# Altium PCB LED_Driver.PcbDoc
Units mm, origin at the board's own origin, x right, y up, seen from the top; angles counter-clockwise.
Board outline 83.27 x 96.75 mm, 2 copper layers (Top Layer, Bottom Layer); 19 components, 12 nets, 55 pads, 0 vias.
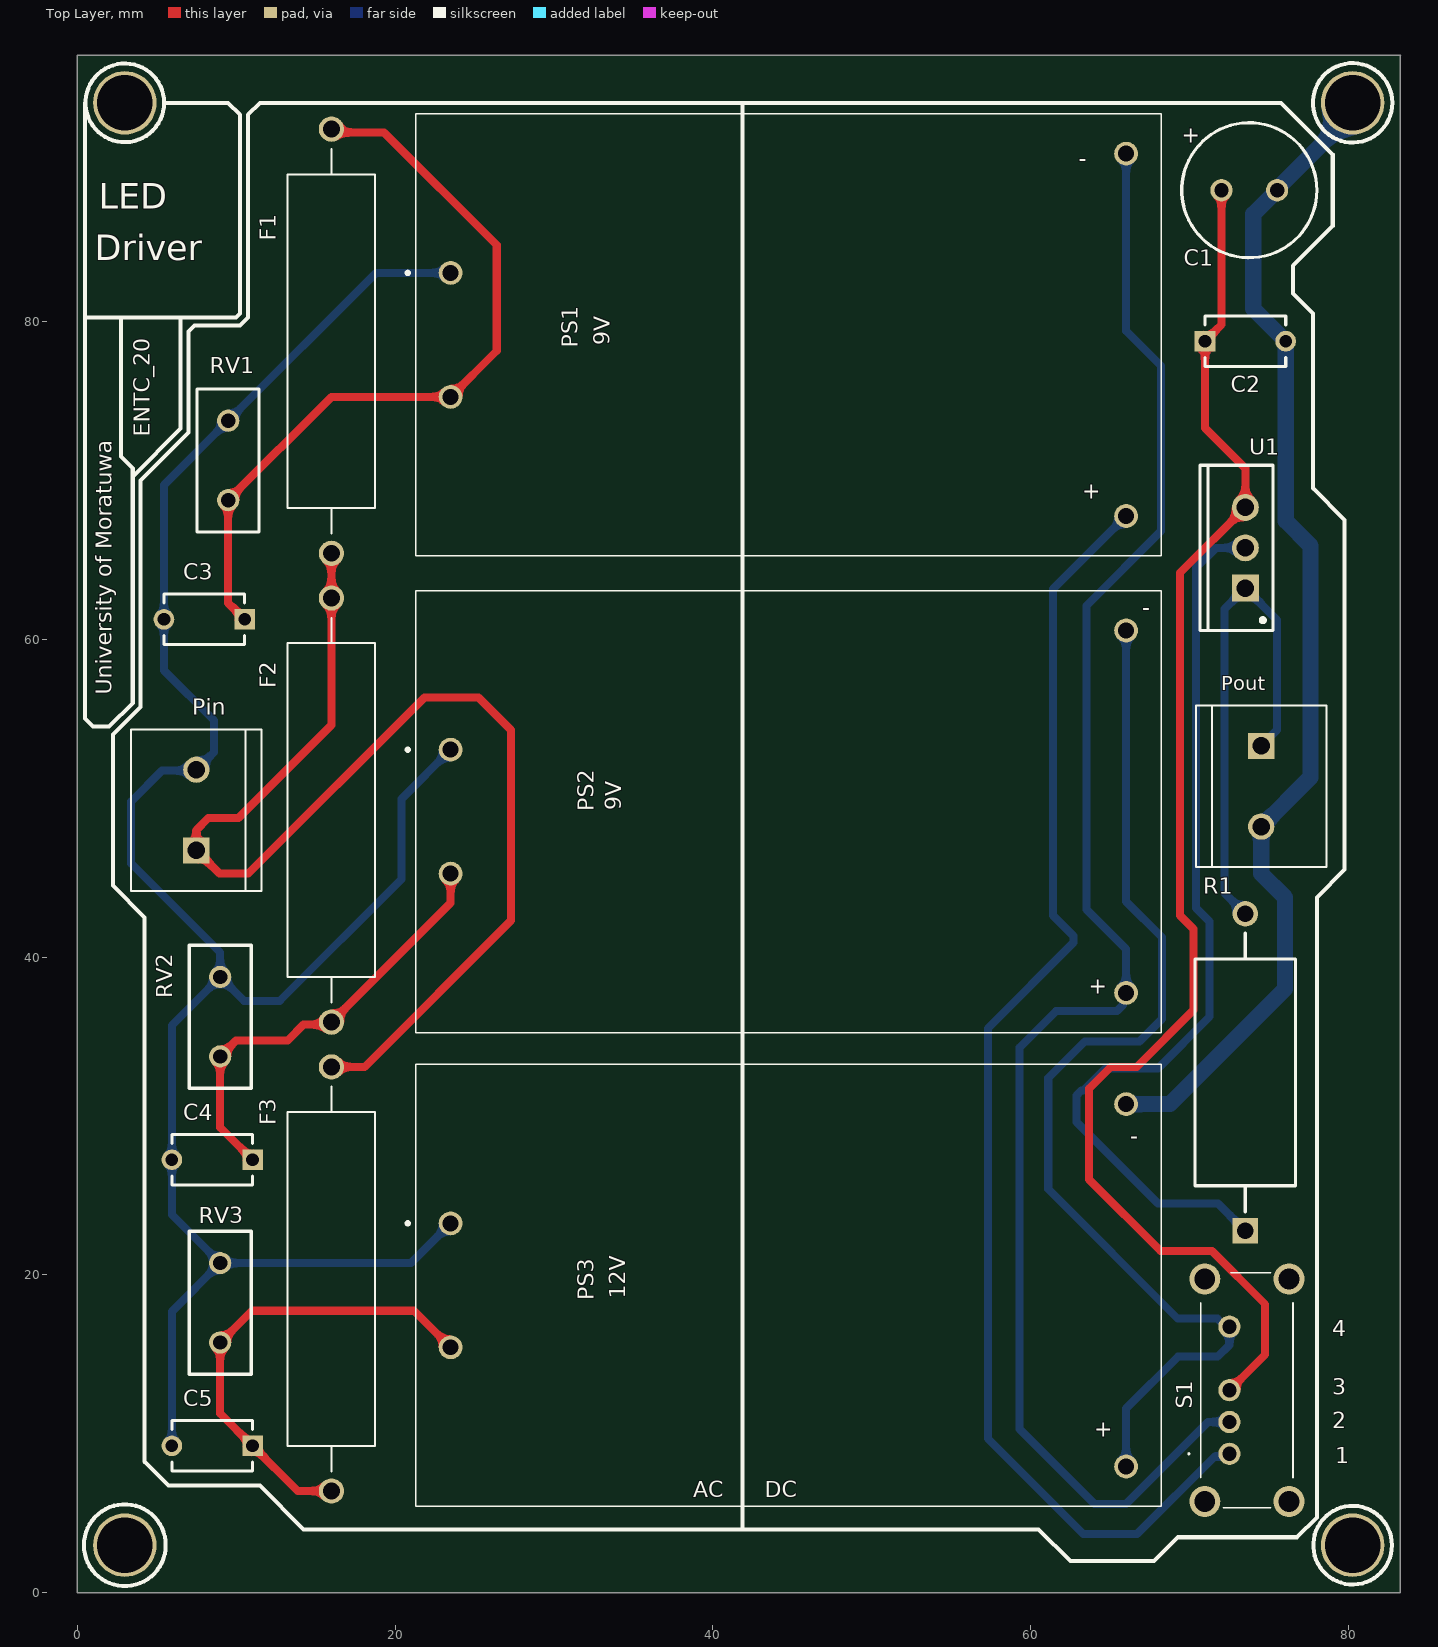
[diagram p0: Top Layer view]
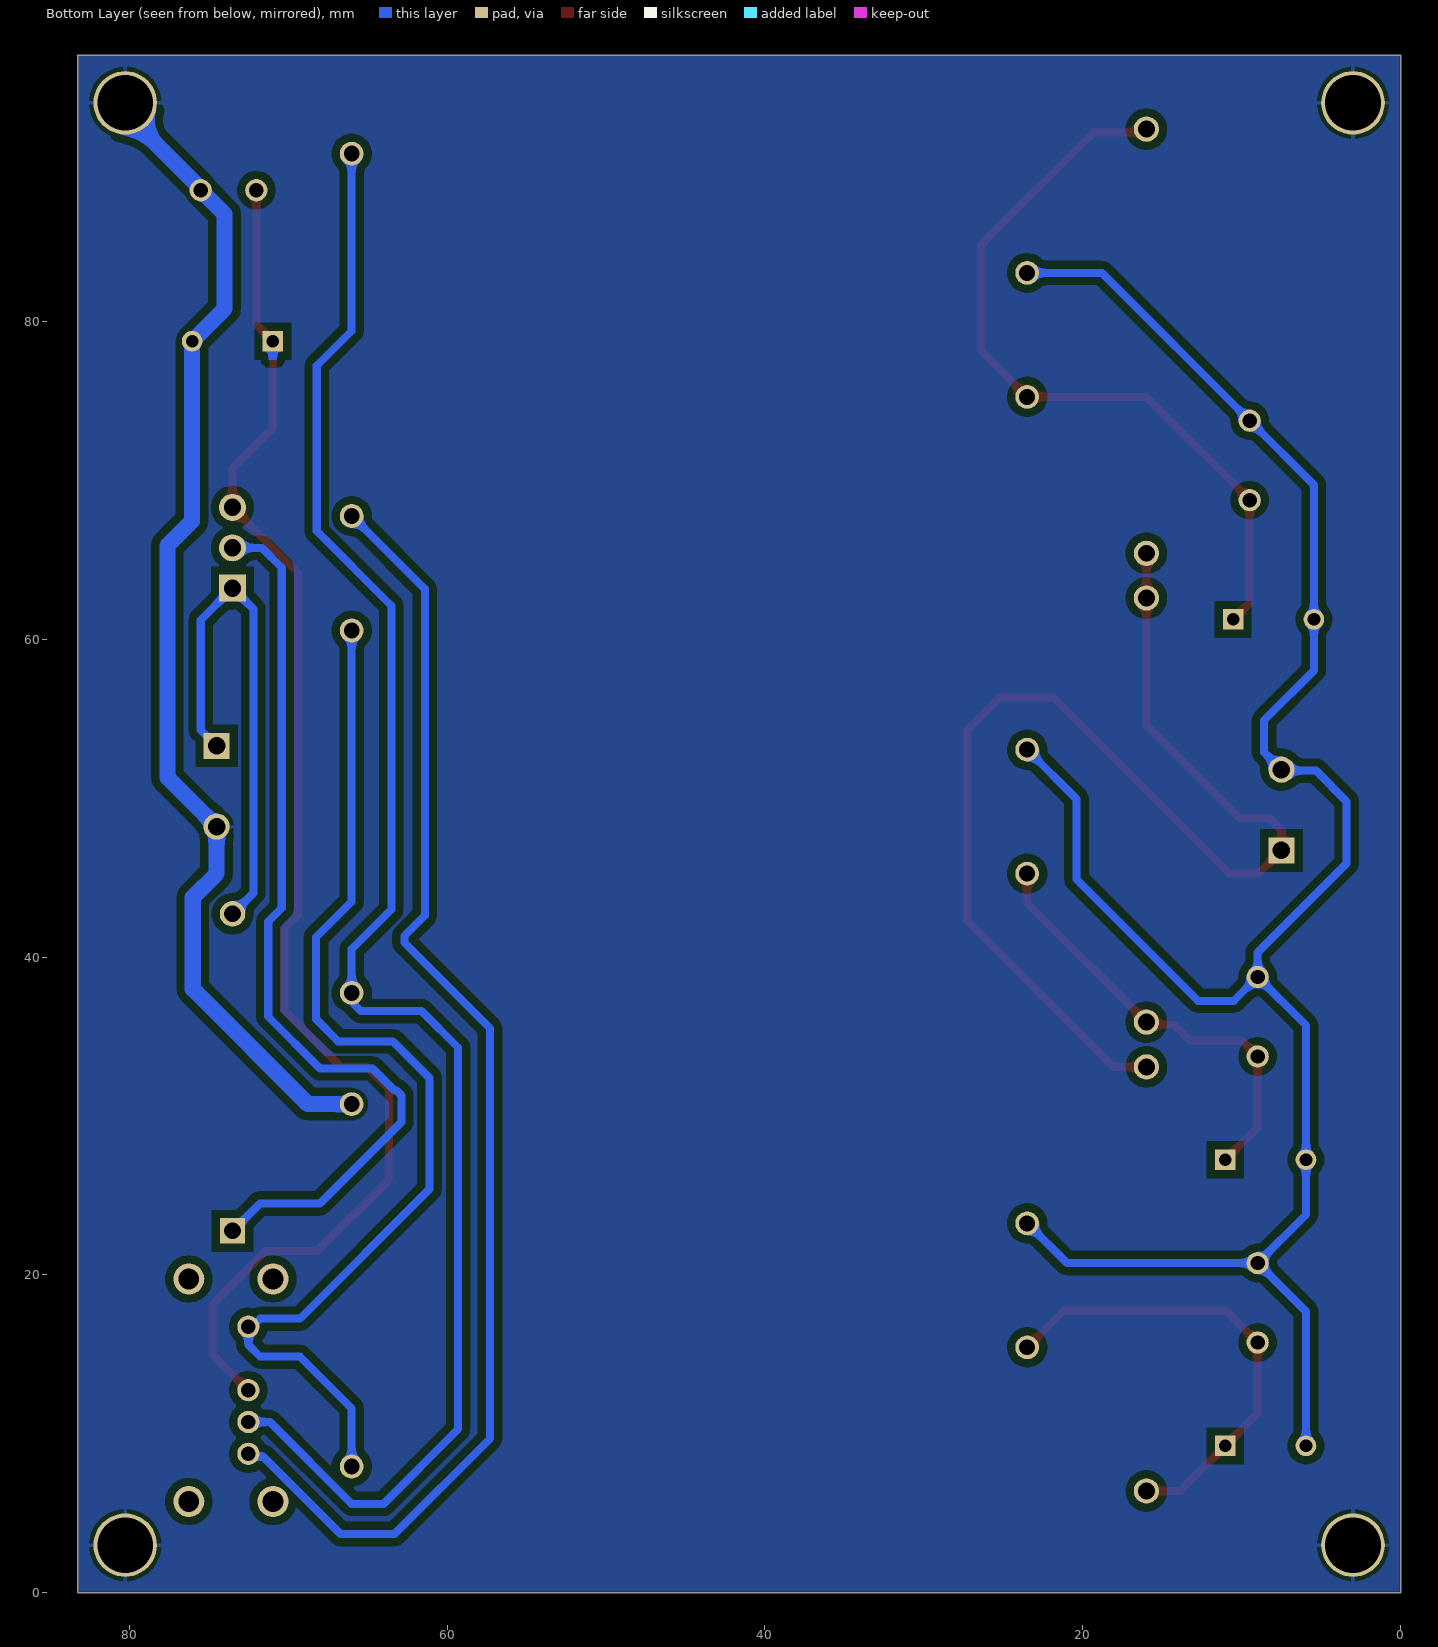
[diagram p1: Bottom Layer view, seen from below]
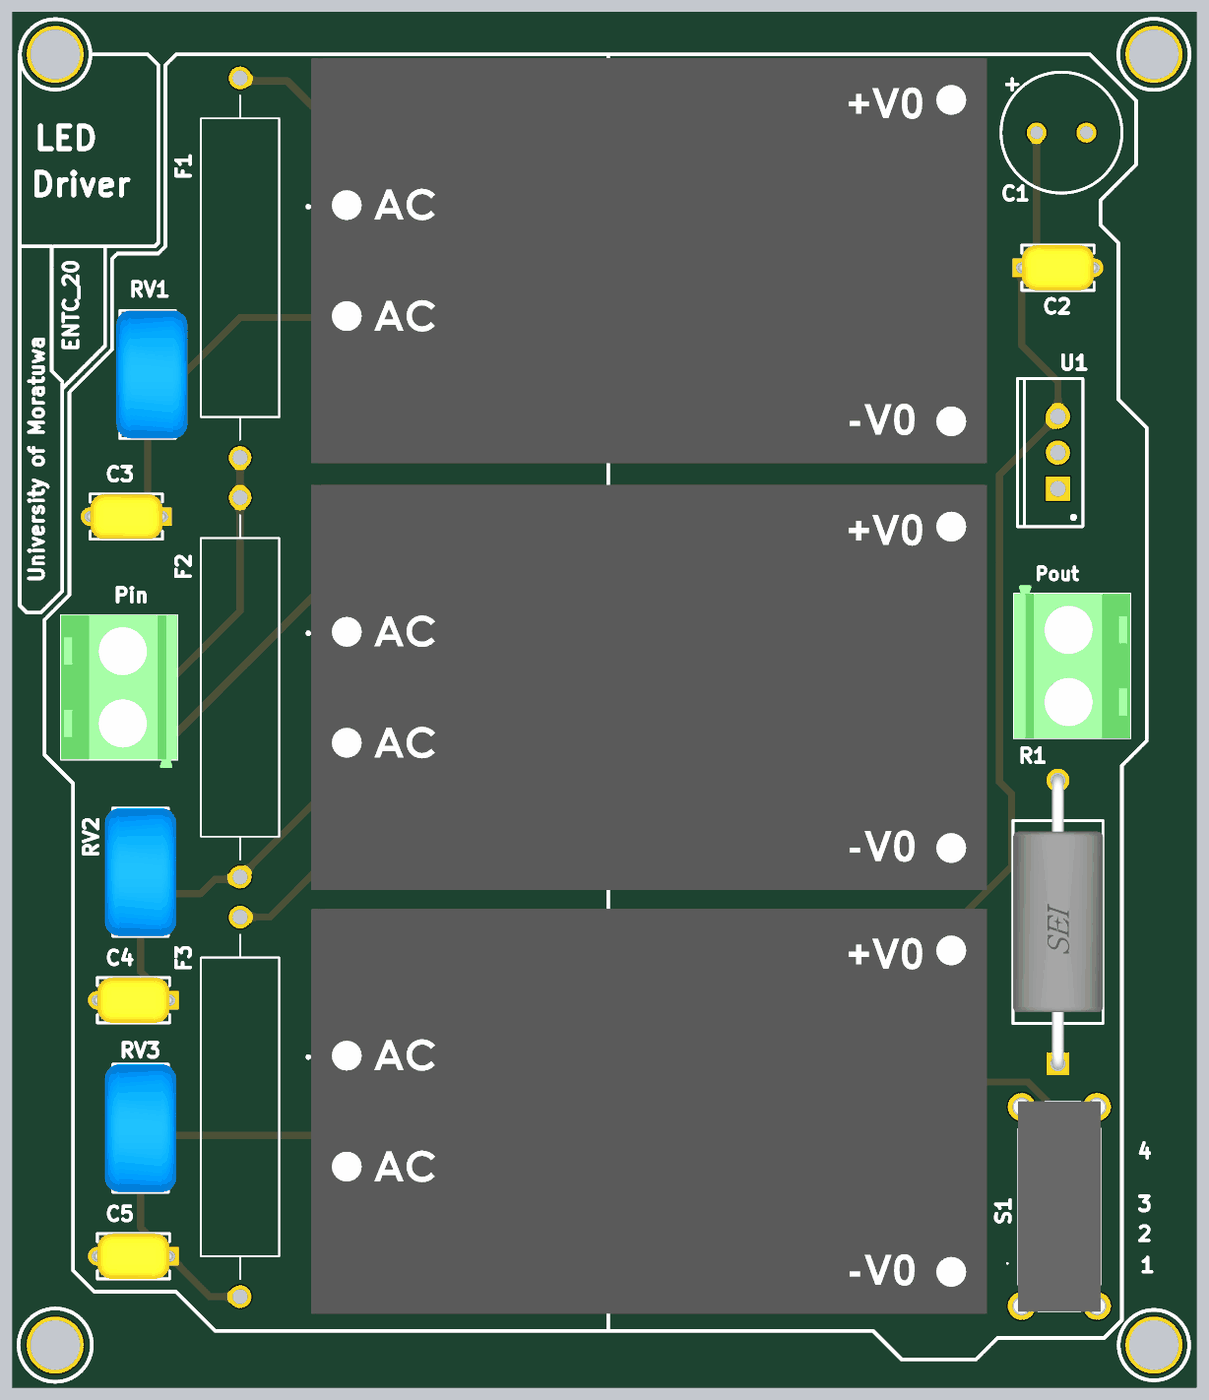
[diagram p2: 3D render of the assembled board from above, using the file's embedded part models]

## Layer stack, top to bottom
Top Solder: solder mask 0.0102, Solder Resist, Dk 3.5
Top Layer: signal copper 0.0356
Dielectric 1: dielectric 0.32, FR-4, Dk 4.8
Bottom Layer: signal copper 0.0356
Bottom Solder: solder mask 0.0102, Solder Resist, Dk 3.5

## Board outline
0,96.75 83.275,96.75 83.25,96.725 83.25,0 0,0 0,0.25

## Design rules (kind name [scope] priority, off if disabled: settings)
AcuteAngle [All] p1: minimum=7.50000000000000E+0001 checktracksonly=TRUE
Clearance [All] p1: gap=0.5 ignorepadtopadclearanceinfootprint=TRUE except(0: Arc-Hole Track-Hole SMDPad-Hole THPad-Hole Via-Hole Fill-Hole Poly-Hole Region-Hole Text-Hole; 0.127: Arc-Text Track-Text SMDPad-SMDPad SMDPad-THPad SMDPad-Text THPad-Text Via-Text Fill-Text Poly-Text Region-Text Text-Text; 0.2: Arc-SMDPad Track-SMDPad; 0.254: Arc-Via Track-Via Via-Via; 0.33: Arc-THPad Track-THPad; 1: Poly-Poly)
ComponentClearance IGNORE [InComponentClass('Bottom Side Components') vs InComponentClass('Top Side Components')] p1: gap=0 collisioncheckmode=3 verticalgap=2540 showdistances=FALSE
ComponentClearance ComponentClearance_1 [All] p2: gap=0.254 collisioncheckmode=3 verticalgap=0.254 showdistances=FALSE
HoleSize "Via Hole" [IsVia] p1: absolutevalues=TRUE maxlimit=0.6 minlimit=0.3 maxpercent=80.000 minpercent=20.000
HoleSize [All] p2: absolutevalues=TRUE maxlimit=6.3 minlimit=0.4 maxpercent=80.000 minpercent=20.000
HoleToHoleClearance [All] p1: gap=0.5 allowstackedmicrovias=TRUE
MinimumAnnularRing NPTH [InComponent('PS1')] p1: minimumring=0
MinimumAnnularRing Via [IsVia] p2: minimumring=0.14
MinimumAnnularRing [All] p3: minimumring=0.2
MinimumSolderMaskSliver [All] p1: minsoldermaskwidth=0.124
PolygonConnect [All] p1: thpad.connectstyle=Relief thpad.reliefconductorwidth=0.254 thpad.reliefentries=4 thpad.polygonreliefangle="90 Angle" thpad.airgapwidth=0.254 smdpad.connectstyle=Relief smdpad.reliefconductorwidth=0.254 smdpad.reliefentries=4 smdpad.polygonreliefangle="90 Angle" smdpad.airgapwidth=0.254 via.connectstyle=Relief via.reliefconductorwidth=0.254 via.reliefentries=4 via.polygonreliefangle="45 Angle" via.airgapwidth=0.254
RoutingVias [All] p1: holewidth=0.3 width=0.6 viastyle="Through Hole" minholewidth=0.3 minwidth=0.5 maxholewidth=0.711 maxwidth=1.27
SilkToSolderMaskClearance [IsPad] p1: minsilkscreentomaskgap=0.127 clearancetoexposedcopper=TRUE
SolderMaskExpansion [All] p1: expansion=0.102 istentingtop=FALSE
UnRoutedNet [All] p1: checkbadconnections=TRUE
Width GND [InNet('GND')] p1: maxlimit=1.016 minlimit=1.016 preferedwidth=1.016
Width AC [InNetClass('AC')] p2: maxlimit=1.524 minlimit=1.524 preferedwidth=1.524
Width V_out [InNetClass('V_out')] p3: maxlimit=1.016 minlimit=1.016 preferedwidth=1.016
Width [All] p4: maxlimit=0.762 minlimit=0.254 preferedwidth=0.508
24 further rules are at their usual default settings.

## Components (designator, comment, footprint, x,y, rotation, side; value= is the part's Value field where it differs from the comment)
C1 "ECA-1VM221" PNSC-ECA-1VM221-2 73.75,88.25 r0 top
C2 "C322C104K5R5TA" FP-C322C104K5R5TA-MFG 73.5,78.75 r0 top
C3 "C322C104K5R5TA" FP-C322C104K5R5TA-MFG 8,61.25 r180 top
C4 "C322C104K5R5TA" FP-C322C104K5R5TA-MFG 8.5,27.25 r180 top
C5 "C322C104K5R5TA" FP-C322C104K5R5TA-MFG 8.5,9.25 r180 top
F1 "5MFP-700-R" FUSAD2668W81L2100D550 16,78.75 r90 top
F2 "5MFP-700-R" FUSAD2668W81L2100D550 16,49.25 r270 top
F3 "5MFP-700-R" FUSAD2668W81L2100D550 16,19.75 r270 top
Pin "282837-2" TE_282837-2 7.5,49.25 r90 top
Pout "282837-2" TE_282837-2 74.5,50.75 r270 top
PS1 "HLK-10M05" HLK10M05 23.5,83.05 r0 top
PS2 "HLK-10M05" HLK10M05 23.5,53.05 r0 top
PS3 "HLK-10M05" HLK10M05 23.5,23.25 r0 top
R1 "SP3AJT10R0" FP-SP3A-MFG 73.5,32.75 r90 top
RV1 "MOV-07D470K" MOV-07DXXXK(3.9T) 9.5,71.25 r90 top
RV2 "MOV-07D470K" MOV-07DXXXK(3.9T) 9,36.25 r90 top
RV3 "MOV-07D470K" MOV-07DXXXK(3.9T) 9,18.25 r90 top
S1 "MFS101EA-Z" MFS101EAZ 72.5,8.75 r90 top
U1 "LM317T" TO-220 73.5,65.75 r90 top

## Footprints (in the part's own frame and the unit in brackets; to place one, negate y for a bottom-side part, rotate by r counter-clockwise, add the part's x,y. Pads: shape width x height; smd on the part's side, far side on the other; paste and mask are expansions set on the pad)
FP-C322C104K5R5TA-MFG [mm]
  rect 1.3x1.3 hole 0.8 paste-1000 mask+0: 1(-2.54,0)
  round 1.3 hole 0.8 paste-1000 mask+0: 2(2.54,0)
  silkscreen extent -2.54,-1.59 2.54,1.59, body extent -3.29,-1.69 3.29,1.69, height 0.25
FP-SP3A-MFG [mm]
  rect 1.6x1.6 hole 1.05 paste-1000 mask+0: 1(-9.973,0)
  round 1.6 hole 1.05 paste-1000 mask+0: 2(9.973,0)
  silkscreen extent -8.77,-3.17 8.77,3.17, body extent -10.87,-3.26 10.87,3.26, height 0.25
FUSAD2668W81L2100D550 [mm]
  round 1.59 hole 1.06: 1(-13.342,0) 2(13.342,0)
  silkscreen extent -12.1,-2.75 12.1,2.75
HLK10M05 [mm]
  round 1.5 hole 1: 1(0,0) 2(0,-7.8) 3(42.5,7.5) 4(42.5,-15.3)
  silkscreen extent -2.8,-17.8 44.7,10, body extent -2.5,-18.05 45,10.45, height 21.99
MFS101EAZ [mm]
  round 1.4 hole 0.9: 1(0,0) 2(2,0) 3(4,0) 4(8,0)
  round 1.95 hole 1.3: MH1(-3,-3.75) MH2(-3,1.55) MH3(11,1.55) MH4(11,-3.75)
  silkscreen extent -3.4,-4 11.4,2.6, body extent -3.55,-4.3 11.55,2.1, height 7.9
MOV-07DXXXK(3.9T) [mm]
  round 1.4 hole 0.9: 1(-2.5,0) 2(2.5,0)
  silkscreen extent -4.5,-1.95 4.5,1.95, body extent -4.5,-2.8 4.5,2.2, height 10.99
PNSC-ECA-1VM221-2 [mm] "THD, 2-Leads, Dia 8.5mm, Body Length 12.5mm, Pin Spacing 3.5mm"
  round 1.4 hole 0.9: 1(-1.75,0) 2(1.75,0)
  silkscreen extent -4.25,-4.25 4.25,4.25, body extent -4.25,-4.25 4.25,4.25, height 12.5
TE_282837-2 [mm]
  rect 1.65x1.65 / inner round 1.65 / far side rect 1.65x1.65 hole 1.1: 1(-2.54,0)
  round 1.65 hole 1.1: 2(2.54,0)
  silkscreen extent -5.08,-4.1 5.08,4.1, body extent -5.68,-4.1 5.08,4.1, height 10
TO-220 [mm] "TO, Thru-Hole, Vertical, Heatsink Mounted; 3 In-Line Leads; Pitch 2.54 mm"
  rect 1.7x1.7 hole 1.1: 1(-2.54,0)
  round 1.7 hole 1.1: 2(0,0) 3(2.54,0)
  silkscreen extent -5.2,-1.75 5.2,2.85, body extent -5.25,-1.8 5.25,2.9, height 19.7

## Part data
C1: library part CMP-2000-05311-1, "Aluminum Electrolytic Capacitor, 220 uF, +/- 20%, 35 V, -40 to 85 degC, 2-Pin THD, RoHS, Bulk", Capacitance=220µF, Case Size/Dimension=Ø8x11.5mm, Lifetime@Temperature=2000Hrs@85degC, Manufacturer=Panasonic, Operating Temp Range=-40to+85degC, Operating Temp-Max=85degC, Package Description="2-Pin Axial Lead, Dia 8 mm, Body Length 12.5 mm", Rated Voltage=35V, Ripple Current=350mA, Datasheet URL=https://datasheet.ciiva.com/26341/441851-da-01-en-elko-eca1vm221-m-r-220myf-35v-85c-26341906.pdf, Datasheet Version=Mar-06, Manufacturer URL=http://www.panasonic.com/, Package Reference=ECA-1VM221, Series=M, Type=Radial
C2 C3 C4 C5: library part CMP-03020-034661-1, "CAP CER 0.1UF 50V X7R RADIAL", Capacitance=100nF, Case/Package=Radial, Dielectric=X7R, Dielectric Material=Ceramic, Max Operating Temperature=125°C, Min Operating Temperature=-55°C, Package Quantity=500, Tolerance=10%, Voltage=50V, Construction=RADIAL, Depth=3.18mm, Dissipation Factor=2.5%, Height=3.18mm, Height - Seated (Max)=0.26inch, Lead Diameter=0.51mm, Lead Free="Lead Free", Lead Length=7mm, Lead Pitch=5.08mm, Lead/Base Style="Formed Leads", Length=5.08mm, Material=Ceramic, Mount="Through Hole", Number of Pins=2, Packaging=Bulk, Radiation Hardening=No, REACH SVHC="No SVHC", RoHS Compliant=Yes, Series="Golden Max™", Termination=Radial, Voltage Rating=50V, Voltage Rating (DC)=50V, Weight=0.0625lb, Width=0.125inch
F1 F2 F3: "5MFP 1-R (0651R1000-33)", Package=None, Availability=Unavailable, MP=5MFP-700-R, Price=None
Pin Pout: "Ð Ð°Ð·ÑŠÐµÐ¼Ð½Ñ‹Ðµ ÐºÐ»ÐµÐ¼Ð¼Ð½Ñ‹Ðµ ÐºÐ¾Ð»Ð¾Ð´ÐºÐ¸ Ð Ð¾Ð·ÐµÑ‚ÐºÐ° 2 Ð¿Ð¾Ð»Ð¾Ð¶ÐµÐ½Ð¸Ñ 5,08 Ð¼Ð¼ ÐŸÑ€Ð¸Ð¿Ð¾Ð¹ Ð¿Ñ€ÑÐ¼Ð¾Ð¹ Ñ‡ÐµÑ€ÐµÐ· Ð¾Ñ‚Ð²ÐµÑ€ÑÑ‚Ð¸Ðµ 13,5 Ð / ÐºÐ¾Ð½Ñ‚Ð°ÐºÑ‚", Package=None, Availability="In Stock", Check_prices=https://www.snapeda.com/parts/282837-2/TE+Connectivity+AMP+Connectors/view-part/?ref=eda, MF="TE Connectivity", MP=282837-2, Price=None, Purchase-URL=https://pricing.snapeda.com/search/part/282837-2/?ref=eda, SnapEDA_Link=https://www.snapeda.com/parts/282837-2/TE+Connectivity+AMP+Connectors/view-part/?ref=snap
PS1 PS2 PS3: "10W Ultra-Compact Power Module", Package=Package, Availability="Not in stock", Check_prices=https://www.snapeda.com/parts/HLK-10M05/Hi-link/view-part/?ref=eda, MF=Hi-link, MP=HLK-10M05, Price=None, SnapEDA_Link=https://www.snapeda.com/parts/HLK-10M05/Hi-link/view-part/?ref=snap
R1: library part CMP-26528-000004-1, "RES 10 OHM 5% 4W AXIAL", Case/Package=Axial, Max Operating Temperature=350°C, Max Power Dissipation=4W, Min Operating Temperature=-55°C, Package Quantity=1, Resistance=4R, Resistor Type=Wirewound, Temperature Coefficient=20ppm/°C, Tolerance=5%, Diameter=5.5mm, Length=12.7mm, Mount="Through Hole", Number of Terminations=2, Packaging="Cut Tape", Power Rating=4W, RoHS Compliant=Yes, Series=SP
RV1 RV2 RV3: "47 V 250 A Varistor 1 Circuit Through Hole Disc 7mm", Package="Disc-7 Bourns", Availability="In Stock", Check_prices=https://www.snapeda.com/parts/MOV-07D470K/Bourns/view-part/?ref=eda, MF=Bourns, MP=MOV-07D470K, Price=None, Purchase-URL=https://pricing.snapeda.com/search/part/MOV-07D470K/?ref=eda, SnapEDA_Link=https://www.snapeda.com/parts/MOV-07D470K/Bourns/view-part/?ref=snap
S1: "Switch", Manufacturer_Name="NIDEC COPAL", Mouser Part Number=229-MFS101EA-Z, Datasheet Link=https://www.mouser.com/datasheet/2/972/mfs-1827296.pdf, Height=7.8mm, Manufacturer_Part_Number=MFS101EA-Z, Mouser Price/Stock=https://www.mouser.co.uk/ProductDetail/Nidec-Copal/MFS101EA-Z?qs=XeJtXLiO41Tf52XT6VD6gg%3D%3D
U1: library part CMP-0244-00444-1, "1.5A, 1.2V to 37V Adjustable Voltage Regulator, 3-Pin TO-220", ComponentLink1Description="Manufacturer URL", ComponentLink1URL=http://www.st.com, ComponentLink2Description=Datasheet, ComponentLink2URL=http://www.st.com/internet/com/TECHNICAL_RESOURCES/TECHNICAL_LITERATURE/DATASHEET/CD00000455.pdf, ComponentLink3Description="Package Specification", ComponentLink3URL=http://www.st.com/internet/com/TECHNICAL_RESOURCES/TECHNICAL_LITERATURE/PACKAGE_INFORMATION/CD00004649.pdf, DatasheetVersion=1/11/2011, PackageDescription="TO, Thru-Hole, Vertical, Heatsink Mounted; 3 In-Line Leads; Pitch 2.54 mm", PackageReference=TO-220, PackageVersion=2011

## Free pads (board coordinates)
  round 4 hole 3.5: 2(80.25,93.75) 3(80.25,3) 4(3,3) 5(3,93.75)

## Nets (pads, with @x,y where several pads share a name; then routed paths per layer and width w, separated by ;. In a path a pad name is that pad's centre, name@x,y a point inside that pad or via, vN(x,y) a via of type N, cw(c..) or ccw(c..) an arc to the next point about the centre after c; other vN are vias at no path point)
GND: C1.2 C2.2 pad.2 pad.3 pad.4 pad.5 Pout.2 PS3.3 | length 74.7
  Bottom Layer w1.016: PS3.3 68.75,30.75 76,38 76,43.75 74.5,45.25 Pout.2 77.6,51.31 77.6,65.882 76.04,67.442 C2.2 74,80.79 74,86.75 C1.2 75.5,88.354 80.25,93.104 pad.2
NetC1_1: C1.1 C2.1 S1.3 U1.3 | length 90.1
  Top Layer w0.508: C1.1 72,79.79 C2.1 70.96,73.29 73.5,70.75 U1.3 69.392,64.182 69.392,42.608 70.242,41.758 70.242,36.668 66.666,33.092 65.03,33.092 63.658,31.72 63.658,26.016 68.174,21.5 71.405,21.5 74.75,18.155 74.75,15 S1.3
NetC3_1: C3.1 F1.2 PS1.2 RV1.1 | length 48.8
  Top Layer w0.508: C3.1 9.5,62.29 RV1.1 16,75.25 PS1.2 26.4,78.15 26.4,84.8 19.315,91.885 F1.2@16.207,91.885
  Bottom Layer w0.508: F1.2 F1.2@16.207,91.885
NetC3_2: C3.2 C4.2 C5.2 Pin.2 PS1.1 PS2.1 PS3.1 RV1.2 RV2.2 RV3.2 | length 135
  Bottom Layer w0.508: C5.2 5.96,17.71 RV3.2 ; PS3.1 21,20.75 RV3.2 ; PS2.1 20.4,49.95 20.4,44.9 12.75,37.25 10.5,37.25 RV2.2 ; PS1.1 18.8,83.05 RV1.2 5.46,69.71 C3.2 5.46,58.04 8.6,54.9 8.6,52.89 7.441,51.731 5.331,51.731 3.4,49.8 3.4,45.9 9,40.3 RV2.2 ; RV3.2 5.96,23.79 C4.2 5.96,35.71 RV2.2
NetC4_1: C4.1 F2.2 PS2.2 RV2.1 | length 27.7
  Top Layer w0.508: C4.1 9,29.29 RV2.1 10,34.75 13.25,34.75 14.25,35.75 15.842,35.75 23.5,43.408 PS2.2
NetC5_1: C5.1 F3.2 PS3.2 RV3.1 | length 29.8
  Top Layer w0.508: F3.2 13.882,6.408 C5.1 9,11.29 RV3.1 11,17.75 21.2,17.75 PS3.2
NetF1_1: F1.1 F2.1 F3.1 Pin.1 | length 76.3
  Top Layer w0.508: F3.1 18.092,33.092 27.3,42.3 27.3,54.3 25.261,56.339 21.854,56.339 10.765,45.25 8.96,45.25 Pin.1 7.5,48 8.25,48.75 10.15,48.75 16,54.6 F2.1 F1.1
NetPout_1: Pout.1 R1.2 U1.1 | length 32.7
  Bottom Layer w0.508: R1.2 72.186,44.037 72.186,61.896 U1.1 75.5,61.21 75.5,54.29 Pout.1
NetPS1_3: PS1.3 PS2.4 S1.2 | length 106.4
  Bottom Layer w0.508: PS1.3 66,79.407 68.2,77.207 68.2,66.8 63.508,62.108 63.508,42.992 66,40.5 PS2.4 65.81,37.56 65.81,36.978 65.433,36.6 61.6,36.6 59.3,34.3 59.3,10.3 64,5.6 66,5.6 71.15,10.75 S1.2
NetPS1_4: PS1.4 S1.1 | length 82.5
  Bottom Layer w0.508: PS1.4 61.4,63.15 61.4,42.62 62.69,41.331 62.69,40.91 57.3,35.52 57.3,9.7 63.3,3.7 66.695,3.7 71.575,8.579 72.329,8.579 S1.1
NetPS2_3: PS2.3 PS3.4 S1.4 | length 69
  Bottom Layer w0.508: PS3.4 66,11.6 69.259,14.859 71.759,14.859 72.5,15.6 S1.4 72.259,16.75 71.759,17.25 69.25,17.25 61.1,25.4 61.1,32.4 63.4,34.7 66.849,34.7 68.25,36.101 68.25,41.25 66,43.5 PS2.3
NetR1_1: R1.1 U1.2 | length 57.8
  Bottom Layer w0.508: R1.1 71.777,24.5 68,24.5 62.878,29.622 62.878,31.302 63.175,31.6 63.3,31.6 64.7,33 68,33 71.25,36.25 71.25,42.25 70.4,43.1 70.4,64.5 71.65,65.75 U1.2
pads on no net: S1.MH1 S1.MH2 S1.MH3 S1.MH4

## Polygon pours and split planes (outlines as drawn)
GND on Bottom Layer "GND_L02_P001" (solid, pour order 1): 0.1,96.7 83.2,96.7 83.2,0.1 0.1,0.1

## Silkscreen, mask and mechanical layers (free items; w line width, h text height)
Top Overlay:
  circle w0.254: c80.25,93.75 r2.5
  circle w0.254: c80.25,3 r2.475
  circle w0.254: c3,3 r2.574
  circle w0.254: c3,93.75 r2.475
  lines w0.254: 0.5,80.25 2.75,80.25 ; 0.5,93.75 0.5,55 1,54.5 2,54.5 3.5,56 3.5,70.25 ; 5.475,93.75 9.5,93.75 10.25,93 10.25,80.5 10,80.25 6.5,80.25 ; 41.874,4.126 41.874,93.725 ; 2.75,80.25 6.5,80.25 ; 2.75,80.25 2.75,78.75 2.75,71.5 3.5,70.75 3.5,70.25 ; 3.5,70.25 6.5,73.25 6.5,77.75 6.5,80.25 ; 2.25,44.5 4.25,42.5 4.25,8.25 5.75,6.75 11.5,6.75 14.25,4 60.5,4 62.5,2 67.75,2 69.25,3.5 76.75,3.5 78,4.75 78,43.75 79.75,45.5 79.75,67.5 77.75,69.5 77.75,80.5 76.5,81.75 76.5,83.5 79,86 79,90.5 75.75,93.75 14.5,93.75 14,93.75 11.5,93.75 10.75,93 10.75,92 10.75,88 10.75,85.5 10.75,80.25 10.25,79.75 7.375,79.75 7,79.375 7,73 4,70 4,55.75 2.25,54 2.25,44.5
  text "-" at 63.004,89.754 h1
  text "LED" at 1.35,87.1 h1.6
  text "Driver" at 1.1,83.85 h1.6
  text "9V" at 33.496,78.504 h1 r90
  text "ENTC_20" at 4.579,72.754 h1 r90
  text "+" at 63.254,68.837 h1
  text "-" at 67.004,61.504 h1
  text "University of Moratuwa" at 2.163,56.504 h1 r90
  text "9V" at 34.246,49.254 h1 r90
  text "+" at 63.654,37.687 h1
  text "-" at 66.254,28.254 h1
  text "12V" at 34.496,18.504 h1 r90
  text "4" at 78.954,16.154 h1
  text "3" at 78.954,12.454 h1
  text "2" at 78.954,10.354 h1
  text "+" at 64.004,9.837 h1
  text "1" at 79.154,8.154 h1
  text "AC" at 38.754,6.004 h1
  text "DC" at 43.254,6.004 h1
Mechanical 1:
  lines w0.5: 0.25,0.25 83,0.25 83,96.5 0.25,96.5 0.25,0.25

## Text inside footprints (layer, text, board x,y; h text height)
C1: Top Overlay "+" at 69.5,91.25 h1